# Altium PCB DS1302.PcbDoc
Units mm, origin at the board's own origin, x right, y up, seen from the top; angles counter-clockwise.
Board outline 50 x 30 mm, 2 copper layers (Top Layer, Bottom Layer); 4 components, 8 nets, 17 pads, 4 vias.
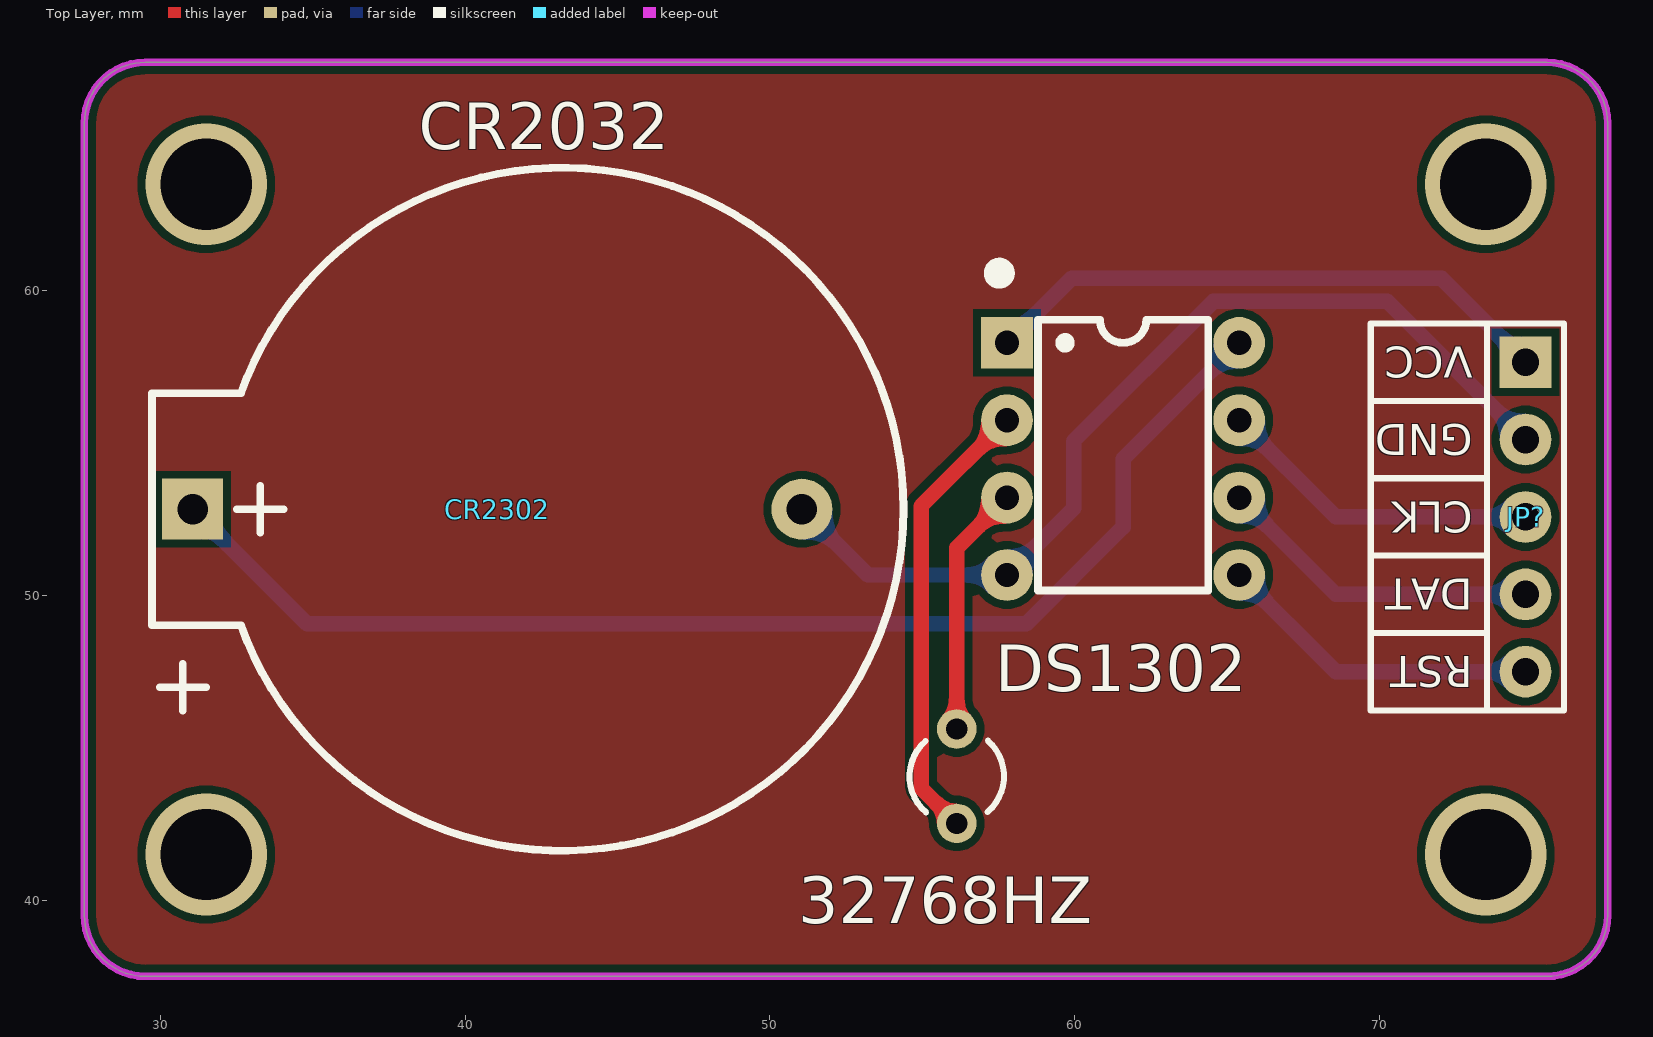
[diagram p0: Top Layer view]
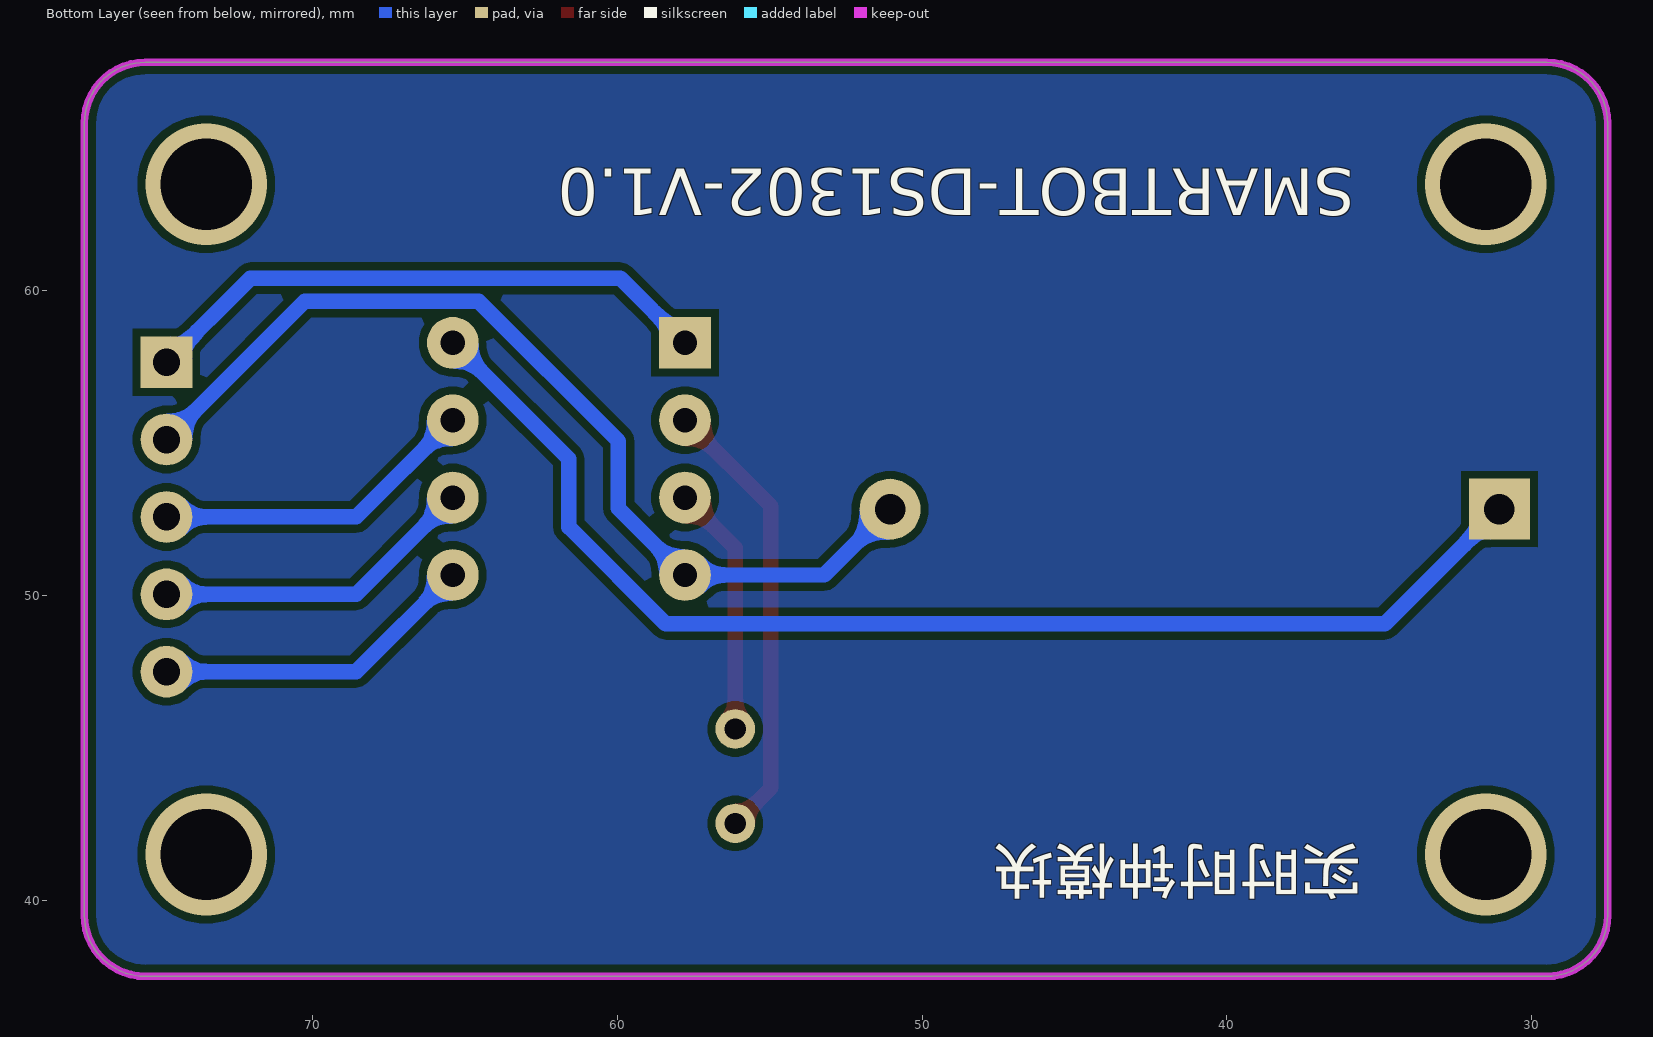
[diagram p1: Bottom Layer view, seen from below]

## Layer stack, top to bottom
Top Solder: solder mask 0.0102, Solder Resist, Dk 3.5
Top Layer: signal copper 0.0356
Dielectric 1: dielectric 0.32, FR-4, Dk 4.8
Bottom Layer: signal copper 0.0356
Bottom Solder: solder mask 0.0102, Solder Resist, Dk 3.5

## Board outline
27.5,39.5 27.5,65.5 cw(c29.5,65.5) 29.5,67.5 75.5,67.5 cw(c75.5,65.5) 77.5,65.5 77.5,39.5 cw(c75.5,39.5) 75.5,37.5 29.5,37.5 cw(c29.5,39.5)

## Design rules (kind name [scope] priority, off if disabled: settings)
Clearance [All] p1: gap=0.254 ignorepadtopadclearanceinfootprint=FALSE except(0: Arc-Hole Track-Hole SMDPad-Hole THPad-Hole Via-Hole Fill-Hole Poly-Hole Region-Hole Text-Hole)
PolygonConnect [All] p1: connectstyle=Relief reliefconductorwidth=0.254 reliefentries=4 polygonreliefangle="90 Angle" airgapwidth=0.254
RoomDefinition DS1302 [InComponentClass('DS1302')] p1: confinementstyle=ConfineIn formatcopy=TRUE lockcomponents=FALSE outline 27.305,37.338 77.597,37.338 77.597,67.691 27.305,67.691
RoutingVias [All] p1: holewidth=0.711 width=1.27 viastyle="Through Hole" minholewidth=0.711 minwidth=1.27 maxholewidth=0.711 maxwidth=1.27
SolderMaskExpansion [All] p1: expansion=0.102 istentingtop=FALSE
Width [All] p1: maxlimit=0.508 minlimit=0.508 preferedwidth=0.508 minimp=50.000000 maximp=50.000000 favimp=50.000000
30 further rules are at their usual default settings.

## Components (designator, comment, footprint, x,y, rotation, side; value= is the part's Value field where it differs from the comment)
32768HZ "XTAL" R38 56.134,44.069 r0 top
CR2302 "1220" CR2032_B 43.18,52.832 r180 top
DS1302 "DS1302Z+T&R" DIP8-300_MH 61.595,54.483 r0 top
JP? "HDR-1X5" HDR-1X5-DS1302 74.803,57.658 r270 top

## Footprints (in the part's own frame and the unit in brackets; to place one, negate y for a bottom-side part, rotate by r counter-clockwise, add the part's x,y. Pads: shape width x height; smd on the part's side, far side on the other; paste and mask are expansions set on the pad)
CR2032_B [mm] "纽扣电池座"
  rect 2x2 hole 1: 1(12.126,0)
  round 2 hole 1: 2(-7.874,0)
  silkscreen extent -11.21,-11.21 13.46,11.21, body extent -11.1,-11.1 13.3,11.1, height 8.75
DIP8-300_MH [mm] "带底座 9.4*7.6*3.8(长宽高）"
  rect 1.7x1.7 hole 0.8: 1(-3.81,3.81)
  round 1.7 hole 0.8: 2(-3.81,1.27) 3(-3.81,-1.27) 4(-3.81,-3.81) 5(3.81,-3.81) 6(3.81,-1.27) 7(3.81,1.27) 8(3.81,3.81)
  silkscreen extent -4.32,-4.32 2.79,6.35, body extent -5,-5.19 5,5.19, height 7.7
HDR-1X5-DS1302 [mm] "排针，5脚，带注释"
  rect 1.7x1.7 hole 0.9: 1(0,0)
  round 1.7 hole 0.9: 2(2.54,0) 3(5.08,0) 4(7.62,0) 5(10.16,0)
  silkscreen extent -1.27,-5.08 11.43,1.27, body extent -1.27,-1.27 11.43,1.27, height 8.5
R38 [mm] "Crystal, Thru-Hole; 2 Leads; Body 3.1 x 8.2 mm (Dia.xH)"
  round 1.3 hole 0.7: 1(0,1.55) 2(0,-1.55)
  silkscreen extent -1.55,-1.19 1.55,1.17

## Part data
32768HZ: "Crystal Oscillator", LatestRevisionDate=17-Jul-2002, LatestRevisionNote="Re-released for DXP Platform.", PackageDescription="Crystal, Thru-Hole; 2 Leads; Body 3.1 x 8.2 mm (Dia.xH)", PackageReference=R38, Published=8-Jun-2000, Publisher="Altium Limited"
CR2302: library part CR-3V, "微型电池", BOM名称=微型电池, 学习资源=www.ooocke.com, 版权归属=源创客
DS1302: library part DS1302Z+T&R_[C8959], "实时时钟", Package=SOIC-8_150mil, SuppliersPartNumber=C8959, ComponentLink1Description=供应商链接, ComponentLink1URL=http://www.szlcsc.com/product/details_9478.html, Supplier=LC
JP?: library part "Header 5_1_DS1302", "5P接插件", BOM名称=5P接插件, 学习资源=www.ooocke.com, 版权归属=源创客

## Via types
v1: diameter 4, hole 3, Top Layer to Bottom Layer, 4 vias

## Nets (pads, with @x,y where several pads share a name; then routed paths per layer and width w, separated by ;. In a path a pad name is that pad's centre, name@x,y a point inside that pad or via, vN(x,y) a via of type N, cw(c..) or ccw(c..) an arc to the next point about the centre after c; other vN are vias at no path point)
GND: CR2302.2 DS1302.4 JP?.2 | length 31.5
  Bottom Layer w0.508: CR2302.2 53.213,50.673 DS1302.4 59.969,52.857 59.969,55.067 64.553,59.651 70.27,59.651 JP?.2
Net32768HZ_1: 32768HZ.1 DS1302.3 | length 8.3
  Top Layer w0.508: 32768HZ.1 56.134,51.562 DS1302.3
Net32768HZ_2: 32768HZ.2 DS1302.2 | length 14.9
  Top Layer w0.508: 32768HZ.2 54.966,43.687 54.966,52.934 DS1302.2
NetCR2302_1: CR2302.1 DS1302.8 | length 41
  Bottom Layer w0.508: CR2302.1 34.813,49.073 58.42,49.073 61.595,52.248 61.595,54.483 DS1302.8
NetDS1302_5: DS1302.5 JP?.5 | length 10.7
  Bottom Layer w0.508: DS1302.5 68.58,47.498 JP?.5
NetDS1302_6: DS1302.6 JP?.4 | length 10.7
  Bottom Layer w0.508: DS1302.6 68.58,50.038 JP?.4
NetDS1302_7: DS1302.7 JP?.3 | length 10.7
  Bottom Layer w0.508: DS1302.7 68.58,52.578 JP?.3
VCC: DS1302.1 JP?.1 | length 19
  Bottom Layer w0.508: DS1302.1 59.905,60.413 72.048,60.413 JP?.1
copper on no net:
  other v1: 31.5,41.5 73.5,41.5 31.5,63.5 73.5,63.5

## Polygon pours and split planes (outlines as drawn)
no net on Top Layer "NONET_L-01_P-001" (solid, pour order 0): 77.597,67.691 77.47,67.564 77.47,37.465 27.432,37.465 27.178,37.719 27.178,67.691
no net on Bottom Layer "NONET_L-01_P-001" (solid, pour order 1): 27.432,67.818 77.597,67.818 77.724,67.691 77.724,37.211 27.051,37.211

## Keep-outs
Keep-Out Layer:
  the board outline again, w0.254

## Silkscreen, mask and mechanical layers (free items; w line width, h text height)
Bottom Overlay:
  text "SMARTBOT-DS1302-V1.0" at 35.814,64.008 h1.52 r180
  text "实时时钟模块" at 35.56,42.166 h2.52 r180

## Text inside footprints (layer, text, board x,y; h text height)
CR2302: Top Overlay "CR2032" at 38.481,64.643 h1.52
JP?: Top Overlay "VCC" at 73.079,58.164 h1.02 r180; Top Overlay "GND" at 73.079,55.624 h1.02 r180; Top Overlay "CLK" at 73.079,53.084 h1.02 r180; Top Overlay "DAT" at 73.079,50.544 h1.02 r180; Top Overlay "RST" at 73.079,48.004 h1.02 r180